# Altium PCB ExtBoard 20Pin v2.PcbDoc
Units mm, origin at the board's own origin, x right, y up, seen from the top; angles counter-clockwise.
Board outline 152.4 x 101.6 mm, 2 copper layers (Top Layer, Bottom Layer); 9 components, 20 nets, 40 pads, 2 vias.
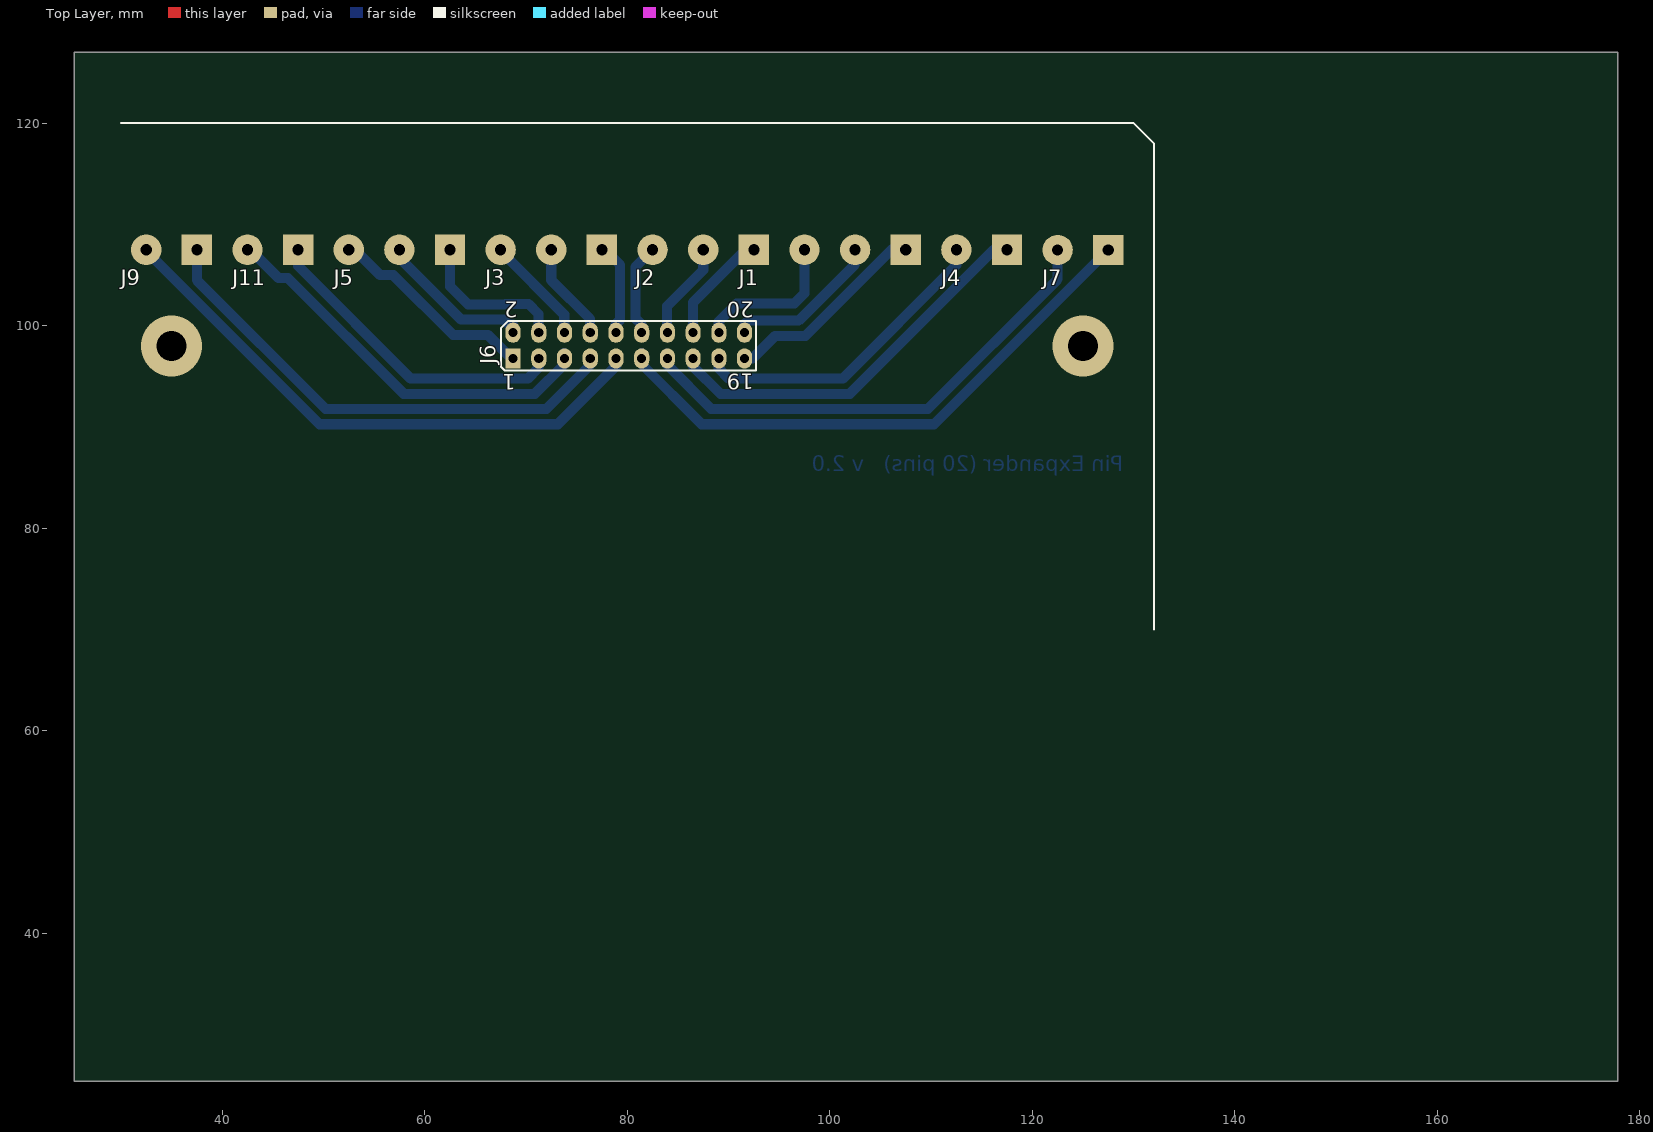
[diagram p0: Top Layer view]
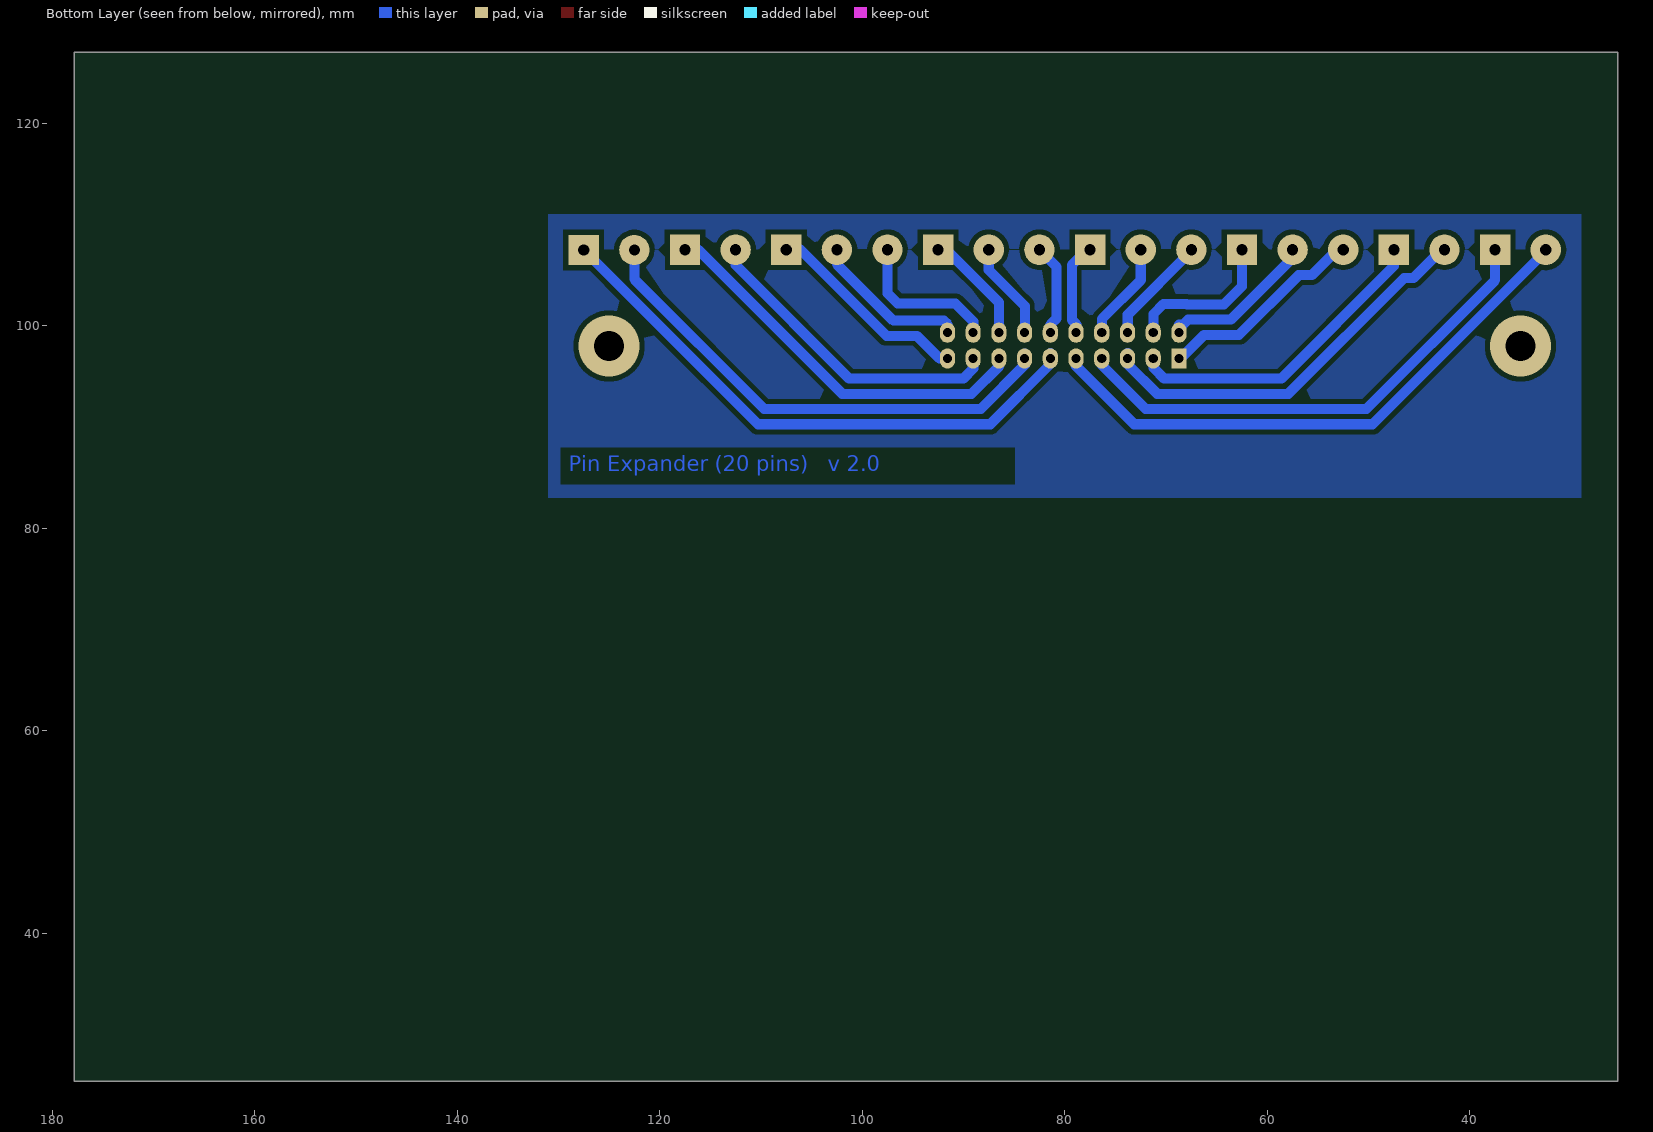
[diagram p1: Bottom Layer view, seen from below]
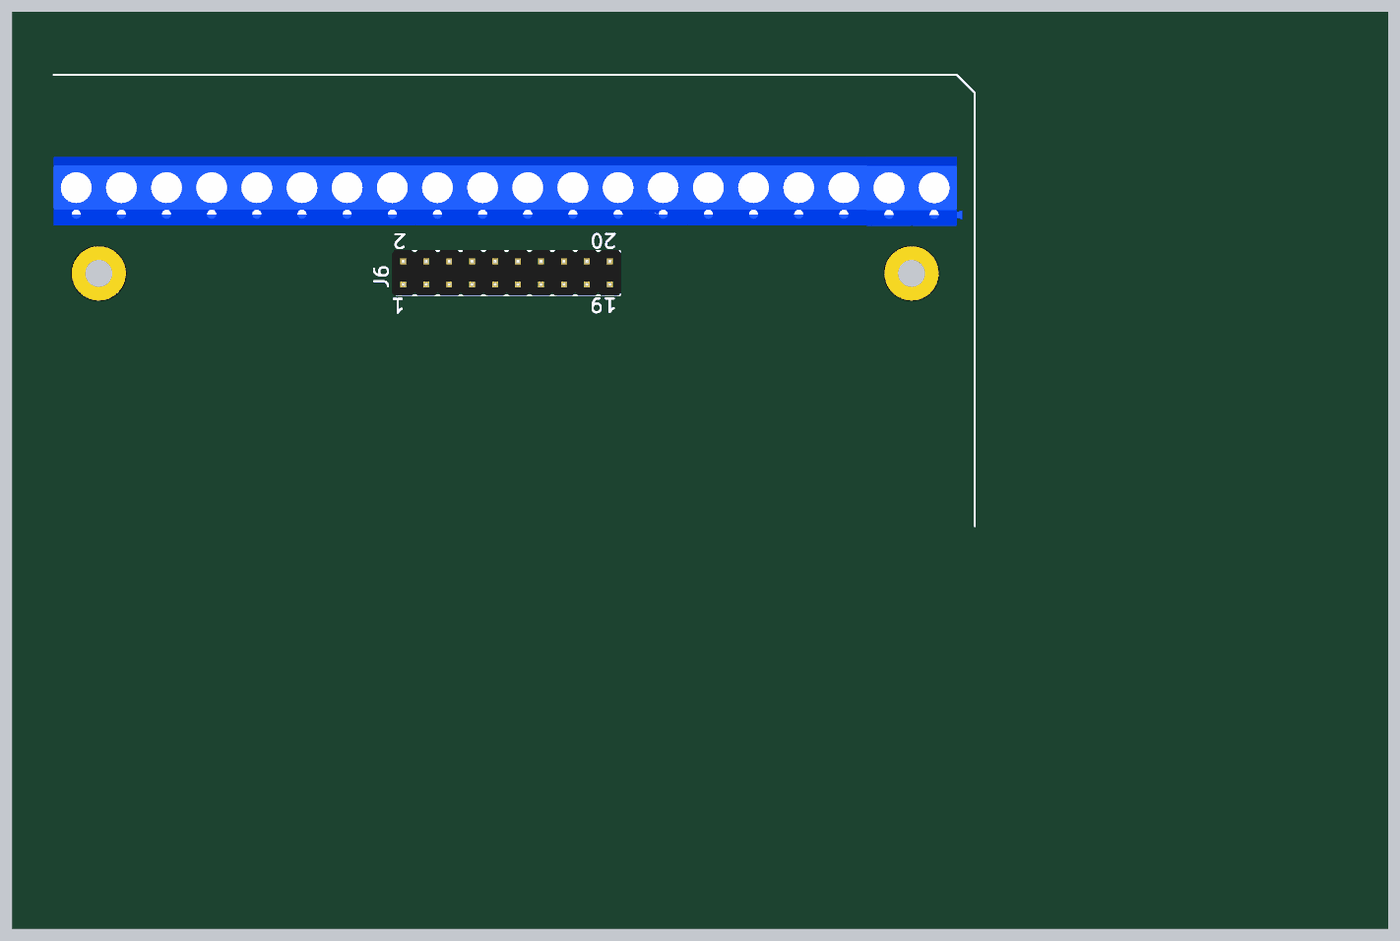
[diagram p2: 3D render of the assembled board from above, using the file's embedded part models]

## Layer stack, top to bottom
Top Solder: solder mask 0.0102, Solder Resist, Dk 3.5
Top Layer: signal copper 0.0356
Dielectric 1: dielectric 0.32, FR-4, Dk 4.8
Bottom Layer: signal copper 0.0356
Bottom Solder: solder mask 0.0102, Solder Resist, Dk 3.5

## Board outline
25.4,25.4 177.8,25.4 177.8,127 25.4,127

## Design rules (kind name [scope] priority, off if disabled: settings)
Clearance [All] p1: gap=0.5
ComponentClearance [All] p1: gap=0 collisioncheckmode=3 verticalgap=0.254 showdistances=FALSE
PolygonConnect [All] p1: connectstyle=Relief reliefconductorwidth=0.254 reliefentries=4 polygonreliefangle="90 Angle" airgapwidth=0.254
RoutingVias [All] p1: holewidth=0.711 width=1.27 viastyle="Through Hole" minholewidth=0.711 minwidth=1.27 maxholewidth=0.711 maxwidth=1.27
SolderMaskExpansion [All] p1: expansion=0.102
Width [All] p1: maxlimit=2 minlimit=0.5 preferedwidth=1
28 further rules are at their usual default settings.

## Components (designator, comment, footprint, x,y, rotation, side; value= is the part's Value field where it differs from the comment)
J1 "Connector" "DG301 5mm 3p" 107.5,107.5 r180 top
J2 "Connector" "DG301 5mm 3p" 92.5,107.5 r180 top
J3 "Connector" "DG301 5mm 3p" 77.5,107.5 r180 top
J4 "Connector" "DG301 5mm 2p" 117.5,107.5 r180 top
J5 "Connector" "DG301 5mm 3p" 62.5,107.5 r180 top
J6 "Connector" "LINE 2.54 x 20D (2 x 10)" 68.725,96.775 r90 top
J7 "Connector" "DG301 5mm 2p" 127.5,107.479 r180 top
J9 "Connector" "DG301 5mm 2p" 37.5,107.5 r180 top
J11 "Connector" "DG301 5mm 2p" 47.5,107.5 r180 top

## Footprints (in the part's own frame and the unit in brackets; to place one, negate y for a bottom-side part, rotate by r counter-clockwise, add the part's x,y. Pads: shape width x height; smd on the part's side, far side on the other; paste and mask are expansions set on the pad)
"DG301 5mm 2p" [mm]
  rect 3x3 hole 1.1: 1(0,0)
  round 3 hole 1.1: 2(5,0)
  body extent -3.1,-3.4 7.5,4.2, height 10
"DG301 5mm 3p" [mm]
  rect 3x3 hole 1.1: 1(0,0)
  round 3 hole 1.1: 2(5,0) 3(10,0)
  body extent -3.1,-3.4 12.5,4.2, height 10
"LINE 2.54 x 20D (2 x 10)" [mm]
  rect 2x1.5 hole 0.9: 1(0,0)
  oval 2x1.5 hole 0.9: 2(2.54,0) 3(0,-2.54) 4(2.54,-2.54) 5(0,-5.08) 6(2.54,-5.08) 7(0,-7.62) 8(2.54,-7.62) 9(0,-10.16) 10(2.54,-10.16) 11(0,-12.7) 12(2.54,-12.7) 13(0,-15.24) 14(2.54,-15.24) 15(0,-17.78) 16(2.54,-17.78) 17(0,-20.32) 18(2.54,-20.32) 19(0,-22.86) 20(2.54,-22.86)
  silkscreen extent -1.2,-23.97 3.7,1.2, body extent -1.27,-24.12 3.81,1.28, height 8.5

## Part data
J1 J2 J3 J5: library part DG301-5.0-3P12, "DG301 series"
J4 J7 J9 J11: library part DG301-5.0-2P12, "DG301 series"
J6: library part "PLD-20 (2 x 10)", "Vert, Dbl line, Male"

## Via types
v1: diameter 6, hole 3, Top Layer to Bottom Layer, 2 vias

## Nets (pads, with @x,y where several pads share a name; then routed paths per layer and width w, separated by ;. In a path a pad name is that pad's centre, name@x,y a point inside that pad or via, vN(x,y) a via of type N, cw(c..) or ccw(c..) an arc to the next point about the centre after c; other vN are vias at no path point)
P1: J5.3 J6.1 | length 20.6
  Bottom Layer w1: J5.3 53.1,107.5 55.6,105 56.9,105 62.8,99.1 66.225,99.1 J6.1@68.638,96.688
P2: J5.2 J6.2 | length 14.7
  Bottom Layer w1: J5.2 57.5,106.7 63.6,100.6 67.821,100.6 68.281,100.14 J6.2@68.7,100.14
P3: J6.3 J11.1 | length 31.5
  Bottom Layer w1: J11.1 47.5,105.9 58.625,94.775 70.175,94.775 71.24,95.84 J6.3@71.24,96.976
P4: J5.1 J6.4 | length 14.5
  Bottom Layer w1: J5.1 62.5,103.9 64.3,102.1 67.935,102.1 67.975,102.14 70.26,102.14 71.24,101.16 J6.4@71.24,100.14
P5: J6.5 J11.2 | length 39.5
  Bottom Layer w1: J11.2 42.775,107.5 45.575,104.7 46.5,104.7 57.925,93.275 70.875,93.275 73.78,96.18 J6.5@73.78,97.28
P6: J3.3 J6.6 | length 10
  Bottom Layer w1: J3.3 67.5,107.379 73.78,101.099 J6.6@73.78,100.14
P7: J6.7 J9.1 | length 48.9
  Bottom Layer w1: J9.1 37.5,104.5 50.225,91.775 72,91.775 J6.7@76.32,96.095
P8: J3.2 J6.8 | length 8.9
  Bottom Layer w1: J3.2 72.5,104.5 76.32,100.68 J6.8@76.32,100.14
P9: J6.9 J9.2 | length 55.9
  Bottom Layer w1: J9.2 32.5,107.379 49.604,90.275 73.15,90.275 J6.9@78.86,95.985
P10: J3.1 J6.10 | length 8.5
  Bottom Layer w1: J3.1 77.8,107.5 79.3,106 79.3,100.58 J6.10@78.86,100.14
P11: J6.11 J7.1 | length 56.8
  Bottom Layer w1: J6.11@81.4,97.3 81.4,96.225 87.35,90.275 110.296,90.275 J7.1 J7.1@127.5,107.5
P12: J2.3 J6.12 | length 8.3
  Bottom Layer w1: J6.12@81.4,100.14 80.8,100.74 80.8,105.8 J2.3
P13: J6.13 J7.2 | length 49.7
  Bottom Layer w1: J6.13@83.94,97.26 83.94,96.135 88.3,91.775 109.675,91.775 122.5,104.6 J7.2@122.5,107.5
P14: J2.2 J6.14 | length 8.8
  Bottom Layer w1: J6.14@83.94,100.14 83.94,101.94 87.5,105.5 J2.2
P15: J4.1 J6.15 | length 39.2
  Bottom Layer w1: J6.15@86.48,97.12 86.48,95.995 89.2,93.275 101.975,93.275 116.2,107.5 J4.1
P16: J2.1 J6.16 | length 10.3
  Bottom Layer w1: J6.16@86.48,100.14 86.48,102.28 91.7,107.5 J2.1
P17: J4.2 J6.17 | length 31.3
  Bottom Layer w1: J6.17@89.02,97.08 89.02,95.78 90.025,94.775 101.275,94.775 112.5,106 J4.2
P18: J1.3 J6.18 | length 14.2
  Bottom Layer w1: J6.18@89.02,100.14 89.02,100.42 90.8,102.2 96.5,102.2 97.5,103.2 J1.3
P19: J1.1 J6.19 | length 20.4
  Bottom Layer w1: J6.19 92.383,96.775 94.608,99 97.6,99 106.1,107.5 J1.1
P20: J1.2 J6.20 | length 14.8
  Bottom Layer w1: J6.20@91.56,100.14 91.92,100.5 96.921,100.5 102.5,106.079 J1.2
copper on no net:
  other v1: 35,98 125,98

## Polygon pours and split planes (outlines as drawn)
no net on Bottom Layer "Top Layer-No Net" (solid, pour order 4): 131,111 131,83 29,83 29,111

## Other copper
Bottom Layer:
  text "Pin Expander (20 pins)   v 2.0" at 128.975,85.65 h1.5

## Silkscreen, mask and mechanical layers (free items; w line width, h text height)
Top Overlay:
  lines w0.2: 30,120 130,120 132,118 132,70

## Text inside footprints (layer, text, board x,y; h text height)
J6: Top Overlay "20" at 92.5,102.375 h1.52 r180; Top Overlay "19" at 92.475,95.25 h1.52 r180; Top Overlay "2" at 69.2,102.35 h1.52 r180; Top Overlay "1" at 69,95.2 h1.52 r180